# EAGLE board wifi Shield V1.1 (EAGLE 6.1)
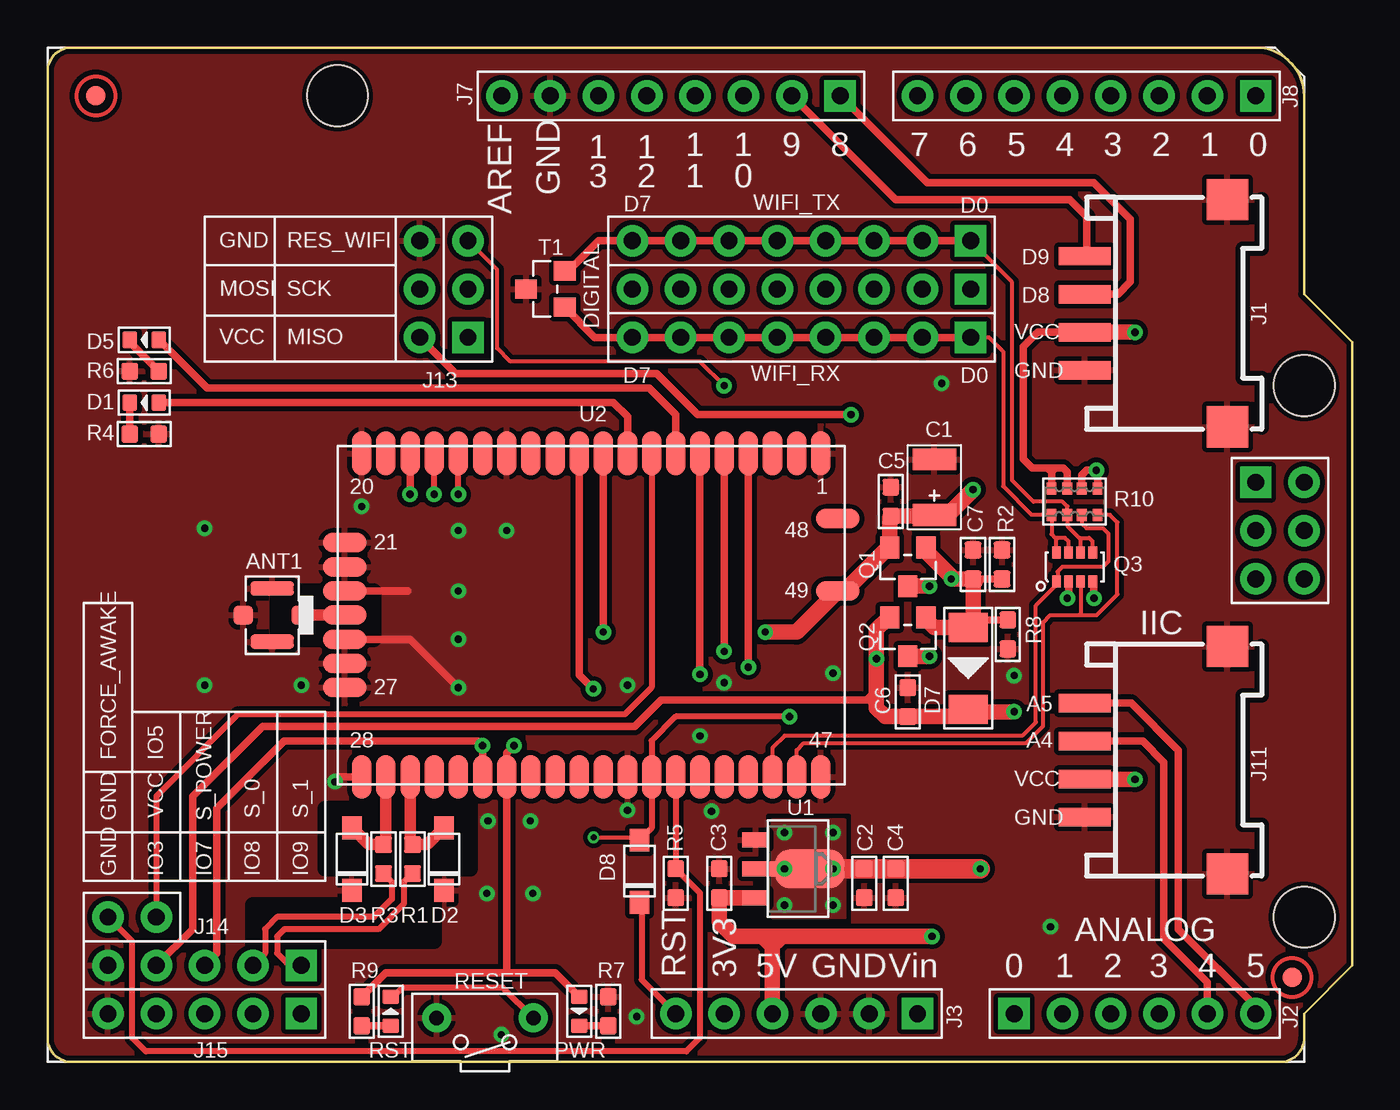
[diagram p0: board, top side]
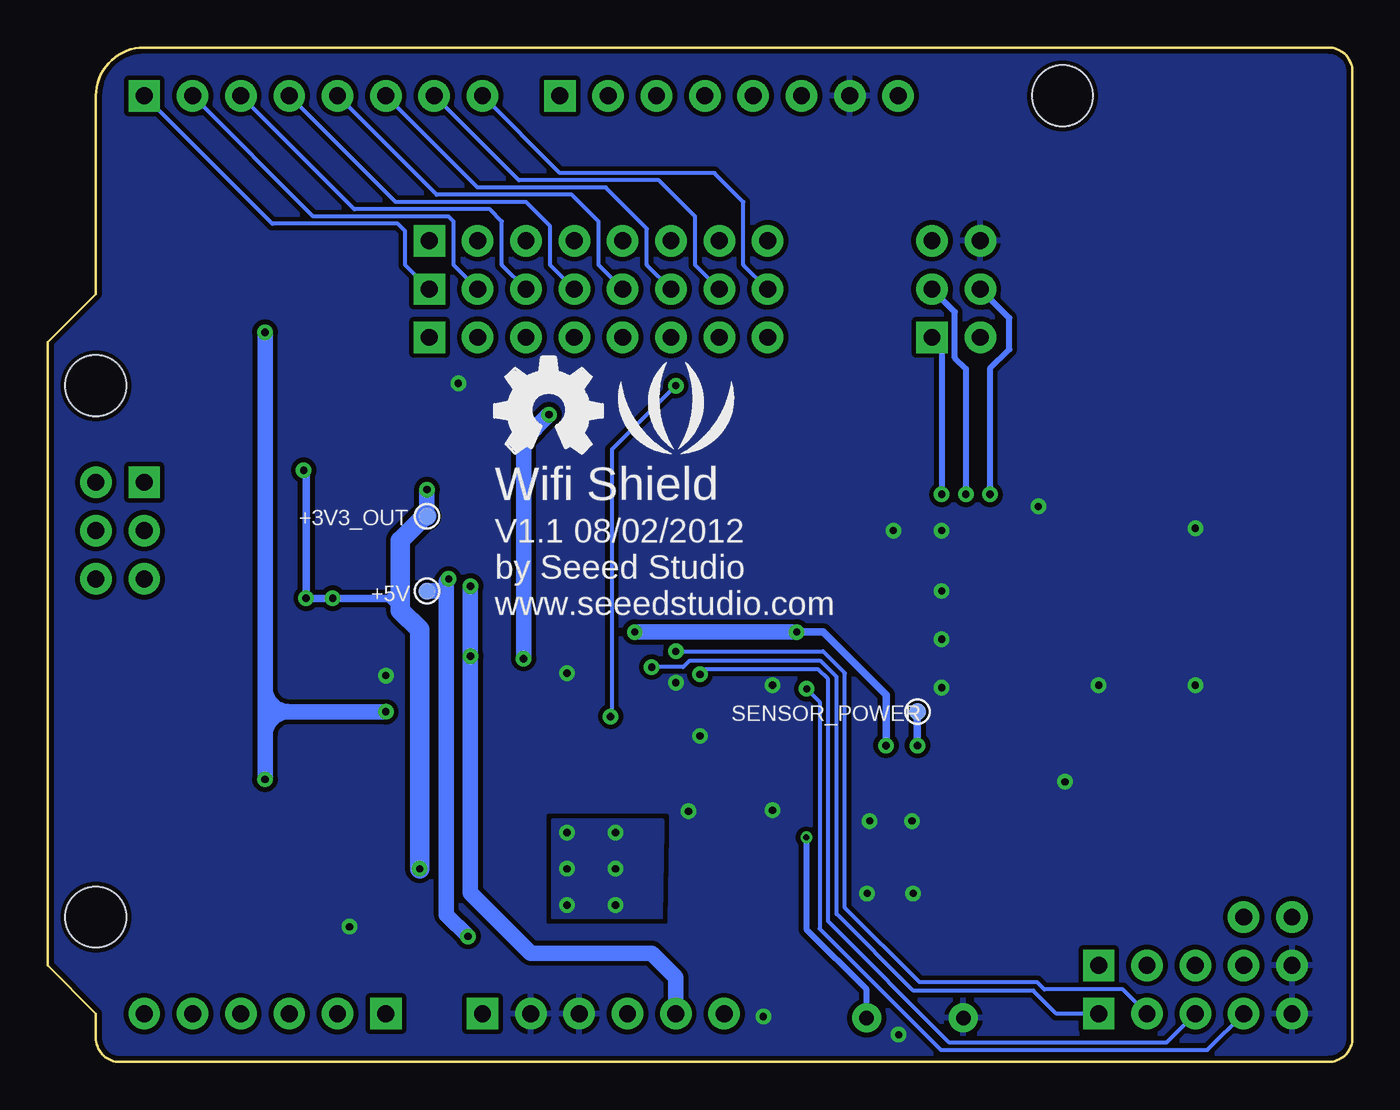
[diagram p1: board, bottom side, seen from below]

Size 68.58 x 53.34 mm. Coordinates in mm from the lower left corner, seen from the top.
Outline: 1.27,53.34 63.5,53.34 arc-90 66.04,50.8 66.04,40.39 68.58,37.85 68.58,5.08 66.04,2.54 66.04,1.27 arc-90 64.77,0 1.27,0 arc-90 0,1.27 0,52.07 arc-90 1.27,53.34
Copper layers (1*16): Top 0.035mm / dielectric 1.5mm / Bottom 0.035mm
Design rules: minimum track width 6mil, minimum drill 12mil, track to track 6mil, track to pad 6mil, pad to pad 6mil, via to via 6mil, smd to smd 0mil, copper to edge 10mil, drill to drill 10mil, minimum pad ring 10mil, minimum via ring 6mil, stop-mask expansion 2mil, vias tented up to drill 32mil, thermal gap 10mil
Net classes: 0 default: width 0.003 mm, drill 0.254 mm, clearance 0.152 mm
tRestrict: 18 lines

## Footprints (pad centres in the part's own frame; a part is rotated, then mirrored left to right if it is on the bottom)
TP_3535 = smd 0.889 x 0.889: T 0,0
4P-U-FL = smd 1.016 x 1.016: D -1.524,0; GND3 1.524,0 | smd 2.286 x 0.762: GND1 0,1.397; GND2 0,-1.397
AVX-B = smd 1.143 x 2.286: + -1.46,0; - 1.46,0
0603 = smd 0.889 x 0.889: 1 -0.762,0; 2 0.762,0
LED-0603 = smd 0.762 x 0.889: + -0.762,0; - 0.762,0
SOD123-2.7X1.6 = smd 1.2 x 1.02: 1 -1.635,0; 2 1.635,0
D2010 = smd 1.524 x 2.032: + -2.159,0; - 2.159,0
8P-2.54 = drill 0.889 pad 1.651 square: 1 0,8.89 | drill 0.889 pad 1.651: 2 0,6.35; 3 0,3.81; 4 0,1.27; 5 0,-1.27; 6 0,-3.81; 7 0,-6.35; 8 0,-8.89
4P-SMD-2.0-90D = smd 0.965 x 2.74: 1 -3,-0.1; 2 -1,-0.1; 3 1,-0.1; 4 3,-0.1 | smd 2.159 x 2.184: SS1 -5.974,7.4; SS2 5.974,7.4
2X3P-2.54 = drill 0.889 pad 1.651 square: 1 -1.27,2.54 | drill 0.889 pad 1.651: 2 -1.27,0; 3 -1.27,-2.54; 4 1.27,-2.54; 5 1.27,0; 6 1.27,2.54
5P-2.54 = drill 0.889 pad 1.651 square: 1 0,5.08 | drill 0.889 pad 1.651: 2 0,2.54; 3 0,0; 4 0,-2.54; 5 0,-5.08
1P-65/35MIL = drill 0.889 pad 1.651: 1 0,0
ROUND-MARK-1.0 = smd 1.016 x 1.016: P$1 0,0
SOT23 = smd 1.016 x 1.143: 1 -0.95,-1.016; 2 0.95,-1.016; 3 0,1.016
1206-8 = smd 0.457 x 0.635: 1 -0.953,-0.762; 2 -0.318,-0.762; 3 0.318,-0.762; 4 0.953,-0.762; 5 0.953,0.762; 6 0.318,0.762; 7 -0.318,0.762; 8 -0.953,0.762
R1206-8 = smd 0.508 x 0.635: 1 -1.206,-0.699; 2 -0.381,-0.699; 3 0.381,-0.699; 4 1.206,-0.699; 5 1.206,0.699; 6 0.381,0.699; 7 -0.381,0.699; 8 -1.206,0.699
2P-7.62X3.56-90D = drill 0.762 pad 1.524: P$1 0,2.54; P$2 0,-2.54
SOT89 = smd 0.8 x 1.4: 1 -1.524,-1.905; 3 1.524,-1.905 | smd 0.8 x 1.9: 2 0,-1.651 | smd 2.032 x 3.65: 4 0,0.94
49P-1.27-26.67X17.78 = smd 1.016 x 2.286: 1 12.065,8.509; 2 10.795,8.509; 3 9.525,8.509; 4 8.255,8.509; 5 6.985,8.509; 6 5.715,8.509; 7 4.445,8.509; 8 3.175,8.509; 9 1.905,8.509; 10 0.635,8.509; 11 -0.635,8.509; 12 -1.905,8.509; 13 -3.175,8.509; 14 -4.445,8.509; 15 -5.715,8.509; 16 -6.985,8.509; 17 -8.255,8.509; 18 -9.525,8.509; 19 -10.795,8.509; 20 -12.065,8.509; 28 -12.065,-8.509; 29 -10.795,-8.509; 30 -9.525,-8.509; 31 -8.255,-8.509; 32 -6.985,-8.509; 33 -5.715,-8.509; 34 -4.445,-8.509; 35 -3.175,-8.509; 36 -1.905,-8.509; 37 -0.635,-8.509; 38 0.635,-8.509; 39 1.905,-8.509; 40 3.175,-8.509; 41 4.445,-8.509; 42 5.715,-8.509; 43 6.985,-8.509; 44 8.255,-8.509; 45 9.525,-8.509; 46 10.795,-8.509; 47 12.065,-8.509 | smd 2.286 x 1.016: 21 -12.954,3.81; 22 -12.954,2.54; 23 -12.954,1.27; 24 -12.954,0; 25 -12.954,-1.27; 26 -12.954,-2.54; 27 -12.954,-3.81; 48 12.954,5.08; 49 12.954,1.27
ARDUINO = drill 0.889 pad 1.651 square: 1 63.5,50.8; 9 41.656,50.8; 17 50.8,2.54; 23 45.72,2.54; 36 63.5,30.48 | drill 0.889 pad 1.651: 2 60.96,50.8; 3 58.42,50.8; 4 55.88,50.8; 5 53.34,50.8; 6 50.8,50.8; 7 48.26,50.8; 8 45.72,50.8; 10 39.116,50.8; 11 36.576,50.8; 12 34.036,50.8; 13 31.496,50.8; 14 28.956,50.8; 15 26.416,50.8; 16 23.876,50.8; 18 53.34,2.54; 19 55.88,2.54; 20 58.42,2.54; 21 60.96,2.54; 22 63.5,2.54; 24 43.18,2.54; 25 40.64,2.54; 26 38.1,2.54; 27 35.56,2.54; 28 33.02,2.54; 31 66.04,30.48; 32 66.04,27.94; 33 66.04,25.4; 34 63.5,25.4; 35 63.5,27.94 | hole 3.2: 15.24,50.8; 66.04,35.56; 66.04,7.62

## Placement (x,y rotation side)
+3V3_OUT  [TP_3535]  48.64,28.7 180 bottom
+5V  [TP_3535]  48.64,24.77 0 bottom
ANT1  [4P-U-FL]  11.81,23.5 180 top
C1  100uF  [AVX-B]  46.61,30.23 90 top
C2  10uF  [0603]  42.93,9.4 90 top
C3  100nF  [0603]  35.31,9.4 270 top
C4  100nF  [0603]  44.58,9.4 90 top
C5  100nF  [0603]  44.32,29.46 90 top
C6  100nF  [0603]  45.21,18.92 90 top
C7  100nF  [0603]  48.64,26.16 90 top
D1  red  [LED-0603]  5.08,34.67 180 top
D2  MMSD4148  [SOD123-2.7X1.6]  20.83,10.67 90 top
D3  MMSD4148  [SOD123-2.7X1.6]  16,10.67 90 top
D5  green  [LED-0603]  5.08,37.97 180 top
D7  1N5819  [D2010]  48.39,20.7 270 top
D8  MBR0520  [SOD123-2.7X1.6]  31.11,10.03 90 top
DIGITAL  2.54-8p-male  [8P-2.54]  39.62,40.64 270 top
J1  [4P-SMD-2.0-90D]  54.61,39.37 270 top
J11  [4P-SMD-2.0-90D]  54.61,15.88 270 top
J13  [2X3P-2.54]  20.83,40.64 180 top
J14  [5P-2.54]  8.26,5.08 270 top
J15  [5P-2.54]  8.26,2.54 270 top
P1  [1P-65/35MIL]  5.71,7.62 0 top
P2  [1P-65/35MIL]  3.17,7.62 0 top
P3  [ROUND-MARK-1.0]  2.54,50.8 0 top
P4  [ROUND-MARK-1.0]  65.41,4.45 0 top
PWR  green  [LED-0603]  27.94,2.67 270 top
Q1  [SOT23]  45.21,26.04 180 top
Q2  [SOT23]  45.21,22.35 180 top
Q3  Si5904BDC  [1206-8]  53.98,26.04 0 top
R1  1k  [0603]  19.18,10.67 270 top
R2  10k  [0603]  50.16,26.16 90 top
R3  1k  [0603]  17.65,10.67 270 top
R4  2.2k  [0603]  5.08,33.02 180 top
R5  100k  [0603]  33.02,9.4 270 top
R6  1k  [0603]  5.08,36.32 0 top
R7  1k  [0603]  29.46,2.67 270 top
R8  10k  [0603]  50.47,22.48 270 top
R9  2.2k  [0603]  16.51,2.67 90 top
R10  4.7k  [R1206-8]  53.98,29.46 0 top
RESET  [2P-7.62X3.56-90D]  22.99,2.31 270 top
RST  red  [LED-0603]  18.03,2.67 90 top
SENSOR_POWER  [TP_3535]  22.86,18.41 0 bottom
T1  CESD5V0AP  [SOT23]  26.16,40.64 90 top
U1  [SOT89]  39.12,10.16 270 top
U2  [49P-1.27-26.67X17.78]  28.57,23.5 0 top
U4  [ARDUINO]  0,0 0 top
U$1  [OSHW_FILLX200_NOTEXT]  45.09,32 0 bottom
U$2  [LOGO_SILK]  35.56,33.66 0 bottom
WIFI_RX  2.54-8p-male  [8P-2.54]  39.62,38.1 270 top
WIFI_TX  2.54-8p-male  [8P-2.54]  39.62,43.18 270 top

## Library data of the parts
+3V3_OUT +5V C1-C7 D1-D3 D5 D7 D8 P1 P2 PWR Q1-Q3 R1-R10 RESET RST SENSOR_POWER T1 = Discrete
ANT1 DIGITAL J1 J11 J13-J15 WIFI_RX WIFI_TX = Connector
P3 P4 = Discrete; PARTNO: DNP
U1 = IC
U2 = Module
U4 = moudle
U$1 U$2 = logo

## Nets
+3V3: Q1.3 Q2.3 U4.27
+3V3_OUT: +3V3_OUT.T C1.+ C2.2 C4.2 C5.1 PWR.+ Q1.2 Q3.2 Q3.4 R9.2 R10.5 R10.6 U1.2 U1.4 U2.10 U2.34 U2.49
+5V: +5V.T C3.2 C7.1 D7.+ Q1.1 Q2.1 R2.1 R8.1 U1.3 U4.26
A0: U4.17
A1: U4.18
A2: U4.19
A3: U4.20
A4: J11.2 U4.21
A5: J11.1 U4.22
AREF: U4.16
D0: DIGITAL.1 U4.1
D1: DIGITAL.2 U4.2
D2: DIGITAL.3 U4.3
D3: DIGITAL.4 U4.4
D4: DIGITAL.5 U4.5
D5: DIGITAL.6 U4.6
D6: DIGITAL.7 U4.7
D7: DIGITAL.8 U4.8
D8: J1.2 U4.9
D9: J1.1 U4.10
D10: U4.11
D11: U4.12
D12: U4.13
D13: U4.14
FORCE_AWAKE: P2.1 R5.1 U2.41
GND: ANT1.GND1 ANT1.GND2 ANT1.GND3 C1.- C2.1 C3.1 C4.1 C5.2 C6.2 C7.2 D2.1 D3.1 J1.4 J1.SS1 J1.SS2 J11.4 J11.SS1 J11.SS2 J13.4 J14.5 J15.5 R2.2 R4.1 R5.2 R6.1 R7.1 R8.2 RESET.P$2 T1.3 U1.1 U2.1 U2.14 U2.20 U2.21 U2.22 U2.23 U2.25 U2.26 U2.27 U2.28 U2.39 U2.47 U4.15 U4.24 U4.25
HBT_RX: Q3.7 Q3.8 R10.1 T1.1 WIFI_RX.1 WIFI_RX.2 WIFI_RX.3 WIFI_RX.4 WIFI_RX.5 WIFI_RX.6 WIFI_RX.7 WIFI_RX.8
HBT_TX: Q3.5 Q3.6 R10.2 T1.2 WIFI_TX.1 WIFI_TX.2 WIFI_TX.3 WIFI_TX.4 WIFI_TX.5 WIFI_TX.6 WIFI_TX.7 WIFI_TX.8
IO3: J15.4 U2.11
IO5: P1.1 U2.8
IO7: J15.3 U2.6
IO8: J15.2 U2.5
IO9: J15.1 U2.4
MISO: J13.1 U2.16
MOSI: J13.5 U2.18
N$1: R9.1 RST.+
N$2: D3.2 R3.1 U2.29
N$3: D2.2 R1.1 U2.30
N$10: U2.2
N$11: U2.3
N$15: D5.+ U2.7
N$20: ANT1.D U2.24
N$22: D1.+ U2.9
N$23: D5.- R6.2
N$25: D1.- R4.2
N$26: PWR.- R7.2
RES: D8.1 U4.28
RES_WIFI: D8.2 J13.3 RESET.P$1 RST.- U2.40
S_0: J14.2 R3.2
S_1: J14.1 R1.2
S_POWER: J14.3 SENSOR_POWER.T U2.33
SCK: J13.2 U2.17
VCC: C6.1 D7.- J1.3 J11.3 J13.6 J14.4 Q2.2 R10.7 R10.8
VIN: U4.23
WIFI_RX: Q3.1 R10.3 U2.45
WIFI_TX: Q3.3 R10.4 U2.46

## Tracks (layer width: path | path; a pad name or v marks a point on that pad's centre or on a via)
+3V3  (via drill 0.38 pad 0.81)
  Top 0.813: Q2.3 v46.35,21.34 | v46.35,25.02 Q1.3
  Bottom 0.813: v46.35,25.02 v46.35,21.34 46.35,8.89 43.18,5.71 36.83,5.71 35.56,4.45 U4.27
+3V3_OUT  (via drill 0.38 pad 0.81)
  Top 0.152: Q3.4 54.93,25.21 54.99,25.15
  Top 0.406: U2.10 v29.21,22.61 | Q3.2 53.66,24.45 v53.59,24.38 | v54.99,24.38 54.99,25.15 | R10.5 55.18,31.05 v55.12,31.11 54.61,31.11 54.36,30.86 R10.6 | v24.51,16.64 24.13,16.26 U2.34 24.13,4.7 | 16.64,3.3 R9.2 17.78,4.7 24.13,4.7 | 24.13,4.7 26.67,4.7 PWR.+
  Top 0.813: v48.64,30.1 47.31,28.77 C1.+ 46.55,28.7 C5.1 44.26,28.64 Q1.2 44.2,27.05 41.91,24.77 U2.49 39.37,22.61 v37.72,22.61 | C4.2 C2.2 v41.27,10.16 U1.4 U1.2
  Top 1.016: v49.02,10.16 C4.2 v41.27,10.16
  Bottom 0.305: 24.36,16.48 v24.51,16.64
  Bottom 0.406: v55.12,31.11 54.99,30.99 v54.99,24.38 v53.59,24.38 50.67,24.38 | 50.04,24.38 50.67,24.38 | 50.67,24.38 50.04,25.02 | 50.67,24.38 50.04,23.75 | v24.51,16.64 24.51,19.3 27.81,22.61 v29.21,22.61
  Bottom 0.813: +3V3_OUT.T v48.64,30.1 | v37.72,22.61 v29.21,22.61
  Bottom 1.016: +3V3_OUT.T 48.77,28.7 50.04,27.43 50.04,25.02 50.04,24.38 50.04,23.75 49.02,22.73 v49.02,10.16
  other vias: 38.73,12.06 38.73,10.16 38.73,8.26 41.27,8.26 41.27,12.06
  pour Top (isolate 0.254, no thermals): 41.91,12.7 38.1,12.7 38.1,7.62 41.91,7.62
  pour Bottom (isolate 0.254, no thermals): 36.26,12.26 36.26,12.7 42.04,12.7 42.04,7.62 36.32,7.62
+5V  (via drill 0.38 pad 0.81)
  Top 0.152: Q2.1 46.1,23.37
  Top 0.406: R8.1 48.77,23.24 | R2.1 C7.1
  Top 0.813: D7.+ 46.61,22.86 46.1,23.37 | D7.+ 48.64,23.11 C7.1 | 48.77,23.24 D7.+ | 48.77,25.27 C7.1 | C7.1 v47.5,25.4 47.5,25.53 46.23,26.8 46.23,26.92 46.1,27.05 Q1.1 | U1.3 C3.2 35.31,7.37 36.07,6.6 37.59,6.6 | v46.48,6.6 37.97,6.6 | 37.97,6.6 37.59,6.6 | 38.1,6.1 38.1,6.48 37.97,6.6 | 38.1,6.1 37.59,6.6 | 38.1,6.1 38.48,6.48 | 38.1,6.1 U4.26
  Bottom 0.813: v46.48,6.6 47.62,7.75 47.62,24.77 | 47.62,24.77 47.62,25.27 v47.5,25.4 | +5V.T 47.62,24.77
A4
  Top 0.406: J11.2 57.55,16.88 58.67,15.75 58.67,6.48 60.96,4.19 U4.21
A5
  Top 0.406: J11.1 56.95,18.88 59.44,16.39 59.44,6.99 63.5,2.92 U4.22
D0
  Bottom 0.203: DIGITAL.1 49.78,41.91 49.78,43.69 50.16,44.07 56.77,44.07 U4.1
D1
  Bottom 0.203: DIGITAL.2 47.24,41.91 47.24,44.2 47.5,44.45 54.61,44.45 U4.2
D2
  Bottom 0.203: DIGITAL.3 44.7,41.91 44.7,44.2 45.34,44.83 52.45,44.83 U4.3
D3
  Bottom 0.203: DIGITAL.4 42.16,41.91 42.16,43.94 43.43,45.21 50.29,45.21 U4.4
D4
  Bottom 0.203: DIGITAL.5 39.62,41.91 39.62,44.2 41.02,45.59 48.13,45.59 U4.5
D5
  Bottom 0.203: DIGITAL.6 37.08,41.91 37.08,43.81 39.24,45.97 45.97,45.97 U4.6
D6
  Bottom 0.203: DIGITAL.7 34.54,41.91 34.54,44.45 36.45,46.35 43.81,46.35 U4.7
D7
  Bottom 0.203: DIGITAL.8 32,41.91 32,45.21 33.53,46.74 41.53,46.74 | 41.53,46.74 41.66,46.74 | 41.53,46.74 41.66,46.74 | 41.66,46.74 U4.8
D8
  Top 0.152: J1.2 54.59,40.37 54.61,40.39
  Top 0.406: 54.48,40.39 54.61,40.39 56.26,40.39 56.9,41.02 56.9,44.32 54.99,46.23 46.23,46.23 U4.9
D9
  Top 0.406: J1.1 54.61,42.47 54.61,44.45 53.72,45.34 44.58,45.34 U4.10
FORCE_AWAKE
  Top 0.305: U2.41 R5.1 34.29,8.89 34.29,1.27 33.57,0.55 5.16,0.55 4.45,1.27 4.45,6.35 P2.1
GND  (via drill 0.38 pad 0.81)
  Top 0.406: U2.28 15.37,14.99 v15.11,14.73 | U2.23 18.92,24.77 | U2.25 19.05,22.23 v21.59,19.68
  other vias: 30.48,13.23 34.9,13.18 52.7,7.11 13.34,19.81 46.99,35.69 21.59,27.94 30.48,19.81 35.56,19.94 41.27,20.45 34.29,17.14 50.8,20.32 23.09,8.86 30.96,2.39 25.5,8.86 23.85,1.44 8.26,19.81 8.26,28.07 24.13,27.94 16.51,29.21 21.59,24.77 21.59,22.23 23.15,12.67 25.37,12.67
  pour Top (isolate 0.254, rank 6): -0.64,53.34 68.58,53.34 69.22,0 0,0
  pour Bottom (isolate 0.254, rank 6): -0.64,53.34 68.58,53.34 69.22,0 0,0
HBT_RX
  Top 0.203: 52.96,27.56 53.02,27.5 Q3.8 | 52.96,27.56 52.77,27.75 R10.1 51.71,28.78 50.22,30.27 50.22,37.36 49.48,38.1 WIFI_RX.1 | Q3.7 53.66,27.37 53.47,27.56 52.96,27.56
  Top 0.406: T1.1 28.77,38.1 WIFI_RX.8 WIFI_RX.7 WIFI_RX.6 WIFI_RX.5 WIFI_RX.4 WIFI_RX.3 WIFI_RX.2 WIFI_RX.1
HBT_TX
  Top 0.203: 54.23,27.56 53.59,28.19 R10.2 53.59,29.21 53.34,29.46 51.82,29.46 50.7,30.58 50.7,41 WIFI_TX.1 | Q3.6 54.29,27.5 54.23,27.56 | 54.23,27.56 54.74,27.56 54.93,27.37 Q3.5
  Top 0.406: T1.2 27.37,41.59 28.96,43.18 WIFI_TX.8 WIFI_TX.7 WIFI_TX.6 WIFI_TX.5 WIFI_TX.4 WIFI_TX.3 WIFI_TX.2 WIFI_TX.1
IO3  (via drill 0.38 pad 0.81)
  Top 0.406: U2.11 27.94,20.36 v28.68,19.62
  Bottom 0.203: J15.4 7.62,0.64 21.64,0.64 28,7 28,18.94 v28.68,19.62
IO5
  Top 0.305: U2.8 31.75,19.68 30.35,18.29 10.03,18.29 5.71,13.97 P1.1
IO7  (via drill 0.38 pad 0.81)
  Top 0.406: U2.6 v34.29,20.38
  Bottom 0.203: J15.3 9.78,1.02 21.18,1.02 27.56,7.4 27.56,20.13 28.07,20.64 34.04,20.64 v34.29,20.38
IO8  (via drill 0.38 pad 0.81)
  Top 0.406: U2.5 v35.56,21.59
  Bottom 0.203: J15.2 12.06,3.81 16.19,3.81 16.57,4.19 22.75,4.19 26.67,8.11 26.67,20.45 27.81,21.59 v35.56,21.59
IO9  (via drill 0.38 pad 0.81)
  Top 0.406: U2.4 v36.83,20.77
  Bottom 0.203: J15.1 15.56,2.54 16.76,3.75 23.08,3.75 27.11,7.78 27.11,20.26 27.94,21.08 34.86,21.08 35.18,20.77 v36.83,20.77
MISO  (via drill 0.38 pad 0.81)
  Top 0.305: v21.59,29.84 U2.16
  Bottom 0.305: v21.59,29.84 21.59,37.59 J13.1
MOSI  (via drill 0.38 pad 0.81)
  Top 0.406: v19.05,29.84 U2.18
  Bottom 0.305: v19.05,29.84 19.05,36.45 18.03,37.47 18.03,39.12 J13.5
N$1
  Top 0.406: RST.+ R9.1
N$2
  Top 0.152: D3.2 16,12.32
  Top 0.61: U2.29 17.78,11.56 R3.1 16.89,11.43 16,12.32
N$3
  Top 0.61: U2.30 19.05,11.56 R1.1 19.95,11.43 D2.2
N$15
  Top 0.406: U2.7 33.02,34.04 31.62,35.43 8.38,35.43 D5.+ 5.84,38 | 5.77,38 5.84,38 | 5.84,38 5.87,38
N$20
  Top 0.61: ANT1.D U2.24
N$22
  Top 0.406: U2.9 30.48,33.93 29.74,34.67 D1.+
N$23
  Top 0.406: D5.- 4.32,37.85 R6.2
N$25
  Top 0.406: D1.- 4.32,33.05 4.29,33.02 R4.2
N$26
  Top 0.406: PWR.- R7.2
RES
  Top 0.305: D8.1 31.11,8.38 31.23,8.27 31.23,4.33 U4.28
RES_WIFI  (via drill 0.3, 0.38 pad 0.81)
  Top 0.203: v35.56,35.56 34.29,36.83 24.32,36.83 23.62,37.53 23.62,41.66 J13.3 | v28.7,11.81 30.97,11.81 D8.2
  Top 0.254: RST.- 18.16,3.43
  Top 0.305: v38.99,18.16 33.02,18.16 31.75,16.89 U2.40 31.75,12.3 D8.2 | 18.16,3.43 18.67,3.94 23.9,3.94 RESET.P$1
  Bottom 0.203: v35.56,35.56 38.92,32.2 38.92,18.23 v38.99,18.16
  Bottom 0.305: RESET.P$1 25.53,3.81 28.7,6.99 v28.7,11.81
S_0
  Top 0.305: R3.2 18.1,9.46 18.1,8.57 17.14,7.62 12.06,7.62 11.43,6.99 11.43,5.71 J14.2
S_1
  Top 0.305: R1.2 18.73,9.46 18.73,8.32 17.4,6.99 12.45,6.99 12.06,6.6 12.06,5.71 12.7,5.08 J14.1
S_POWER  (via drill 0.38 pad 0.81)
  Top 0.406: U2.33 v22.86,16.64 22.61,16.89 12.45,16.89 8.89,13.34 8.89,5.71 J14.3
  Bottom 0.406: v22.86,16.64 SENSOR_POWER.T
SCK  (via drill 0.38 pad 0.81)
  Top 0.305: v20.32,29.84 U2.17
  Bottom 0.305: v20.32,29.84 20.32,36.45 20.89,37.02 20.89,39.43 J13.2
VCC  (via drill 0.38 pad 0.81)
  Top 0.152: Q2.2 44.07,23.37 44.13,23.3 | D7.- 48.39,18.16
  Top 0.305: 52.77,31.05 52.77,30.9 52.76,30.89 52.76,30.99 52.53,31.22
  Top 0.406: 52.96,31.24 53.38,31.24 53.59,31.02 R10.7 | R10.8 52.77,31.05 52.96,31.24 | 43.05,19.05 32.26,19.05 30.86,17.65 11.3,17.65 7.62,13.97 7.62,6.99 J14.4 | 43.18,19.05 43.31,19.05 43.56,19.3 43.31,19.3 43.05,19.05 | 43.05,19.05 43.18,19.05 | 43.18,19.05 43.43,18.8 | 52.96,31.24 51.74,31.24 51.28,31.7 51.28,37.62 52.05,38.38 J1.3 | J13.6 21.46,36.2 32,36.2 34.16,34.04 v42.23,34.04
  Top 0.813: 48.39,18.16 C6.1 44.02,18.16 43.56,18.62 43.56,19.3 v43.56,21.21 43.56,22.73 44.13,23.3 44.2,23.37 | v57.15,14.86 54.53,14.86 J11.3 | v57.15,38.37 J1.3 | v50.8,18.41 48.26,18.41 D7.-
  Bottom 0.813: 57.15,18.41 57.15,19.66 | 57.15,19.66 v57.15,38.37 | v50.8,18.41 55.91,18.41 | 55.91,18.41 57.15,18.41 | v57.15,14.86 57.15,17.17 | 57.15,17.17 57.15,18.41 | 55.91,18.41 arc-90 57.15,17.17 | 55.91,18.41 arc90 57.15,19.66 | v43.56,21.21 43.56,32.7 v42.23,34.04
WIFI_RX
  Top 0.203: R10.3 54.36,28.32 54.61,28.07 55.47,28.07 55.75,27.78 55.75,26.32 55.47,26.04 53.34,26.04 53.09,25.78 53.09,25.34 Q3.1 53.02,25.08 51.94,24 51.94,17.86 51.23,17.14 38.73,17.14 38.1,16.51 U2.45
WIFI_TX
  Top 0.203: R10.4 55.83,28.77 56.22,28.38 56.22,24.59 55.13,23.5 54.36,23.5 | U2.46 39.37,16.38 39.75,16.76 51.43,16.76 52.32,17.66 52.32,23.11 52.7,23.5 54.23,23.5 | 54.23,23.5 54.36,23.5 | Q3.3 54.29,23.56 | 54.29,23.56 54.36,23.5 | 54.29,23.56 54.23,23.5

## Text on the board
tPlace: J7 | J8 | D7 | D0 | GND | RES_WIFI | D9 | D8 | MOSI | SCK | VCC | MISO | VCC | D7 | D0 | GND | IIC | A5 | A4 | FORCE_AWAKE | IO5 | VCC | GND | VCC | S_POWER | S_0 | S_1 | GND | GND | IO3 | IO7 | IO8 | IO9 | J3 | J2
bPlace: Wifi Shield | V1.1 08/02/2012 | by Seeed Studio | www.seeedstudio.com